# Altium PCB PCB1 (1).PcbDoc
Units mm, origin at the board's own origin, x right, y up, seen from the top; angles counter-clockwise.
Board outline 62 x 75 mm, 2 copper layers (Top Layer, Bottom Layer); 48 components, 34 nets, 138 pads, 29 vias.
Unrouted connection lines stored in the file: 19.
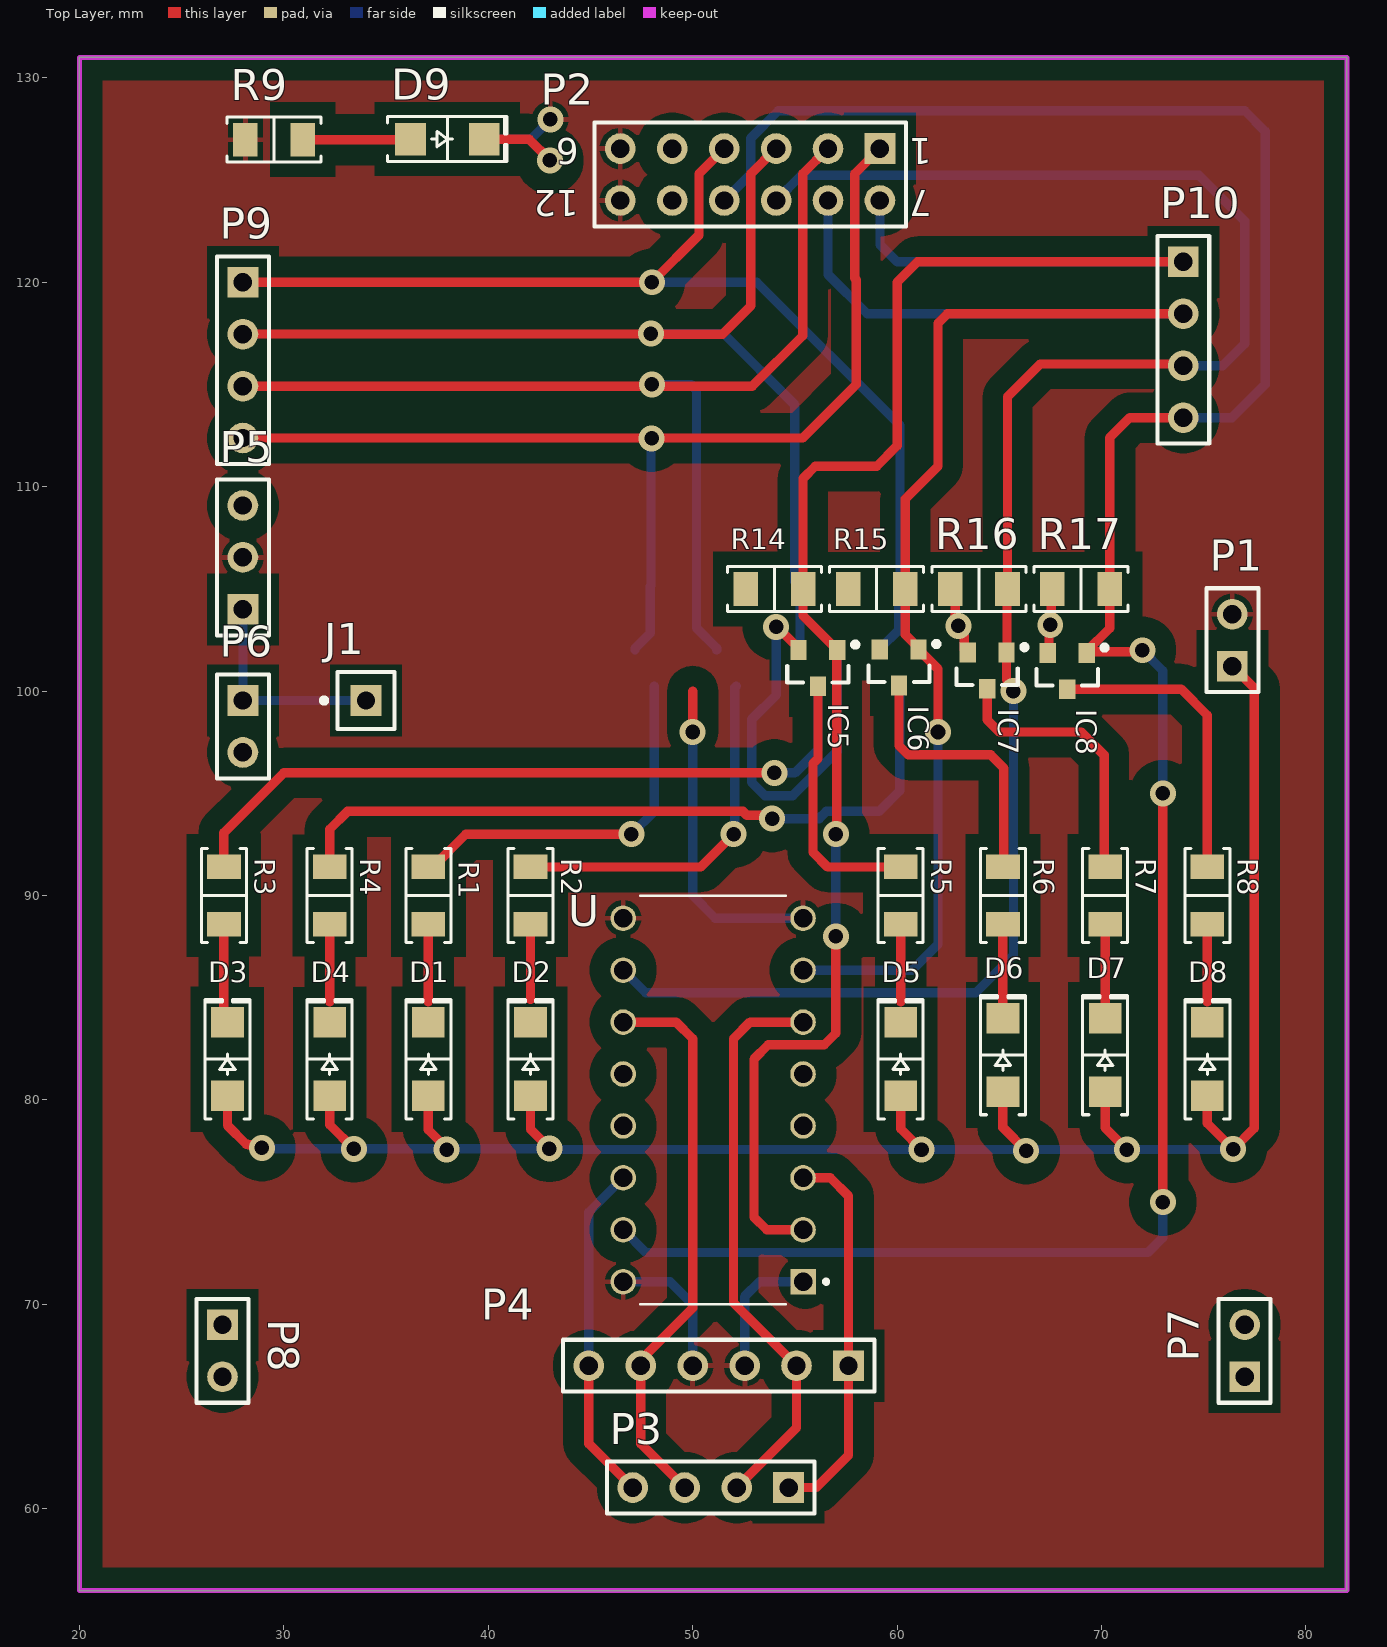
[diagram p0: Top Layer view]
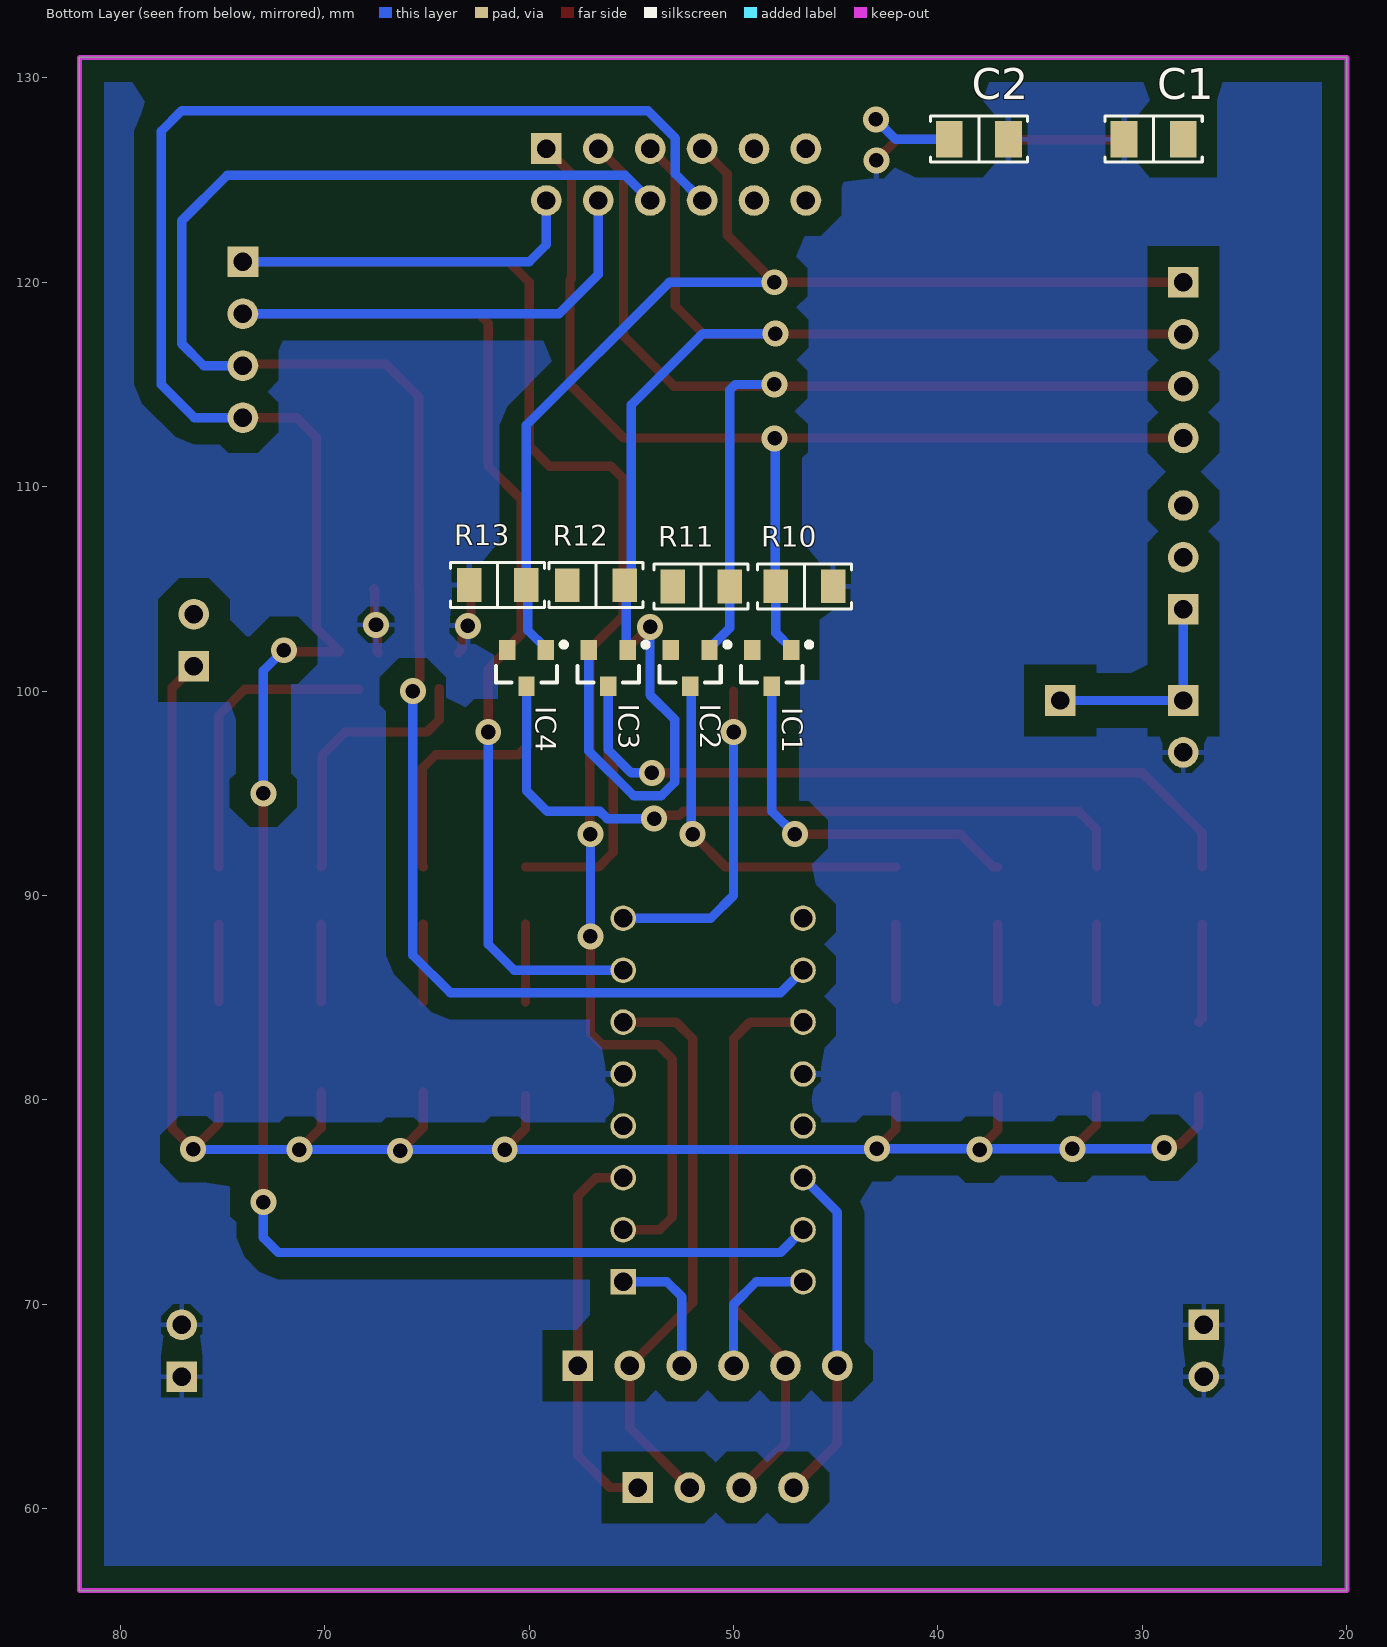
[diagram p1: Bottom Layer view, seen from below]
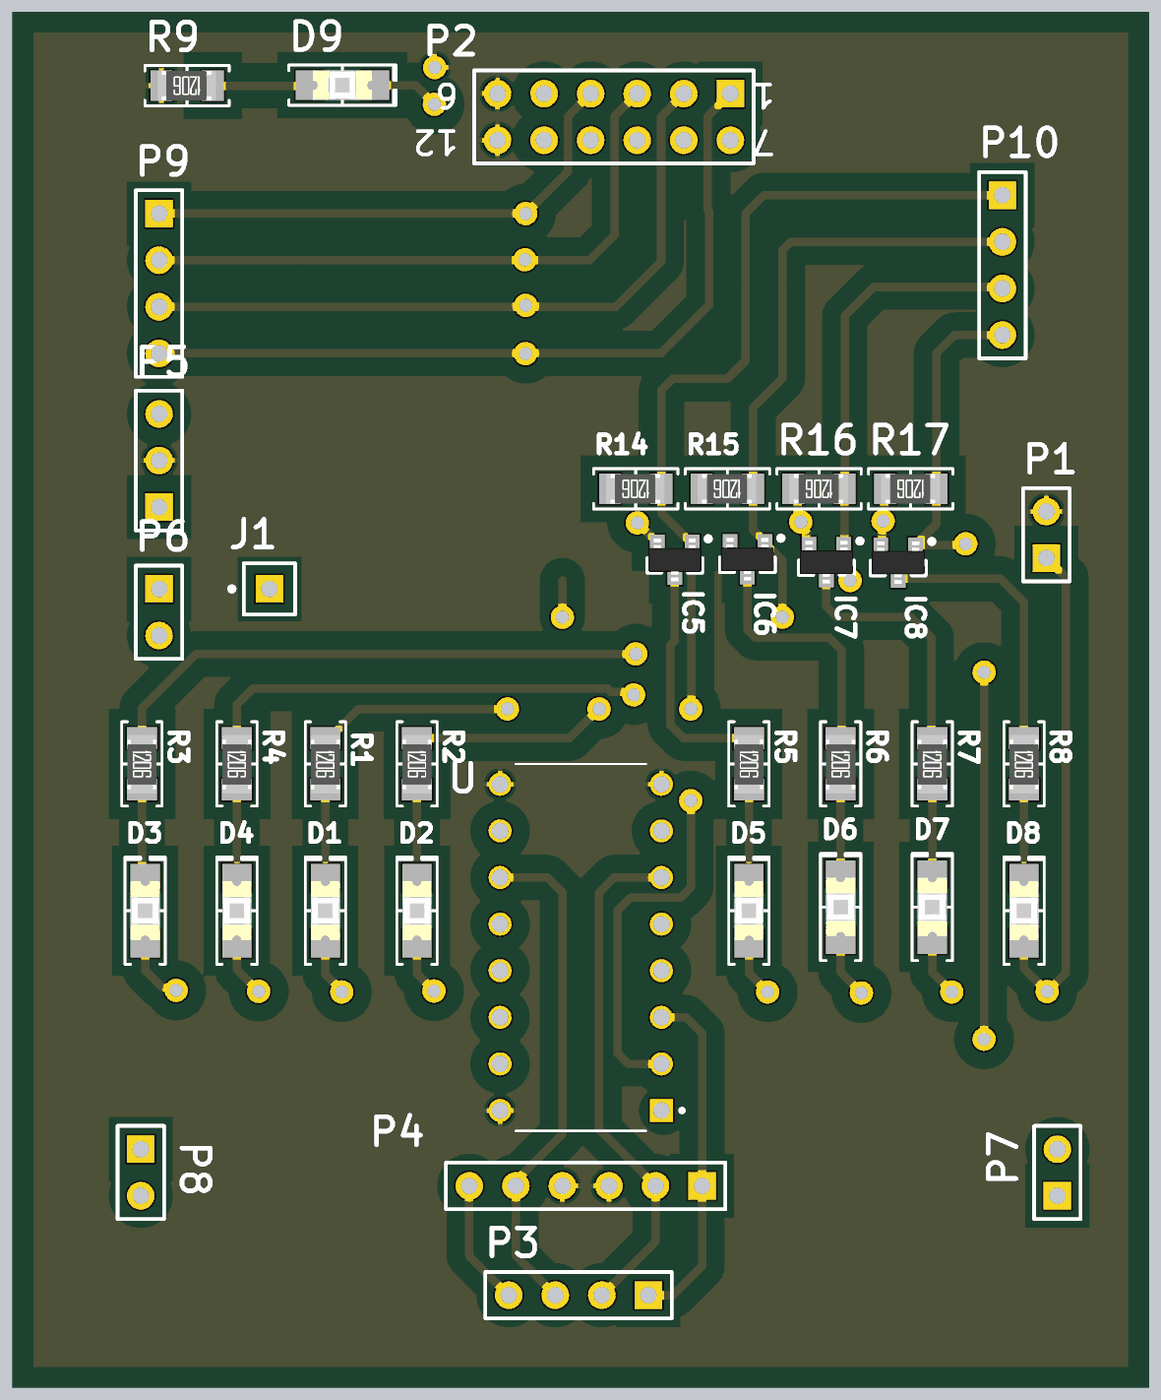
[diagram p2: 3D render of the assembled board from above, using the file's embedded part models]
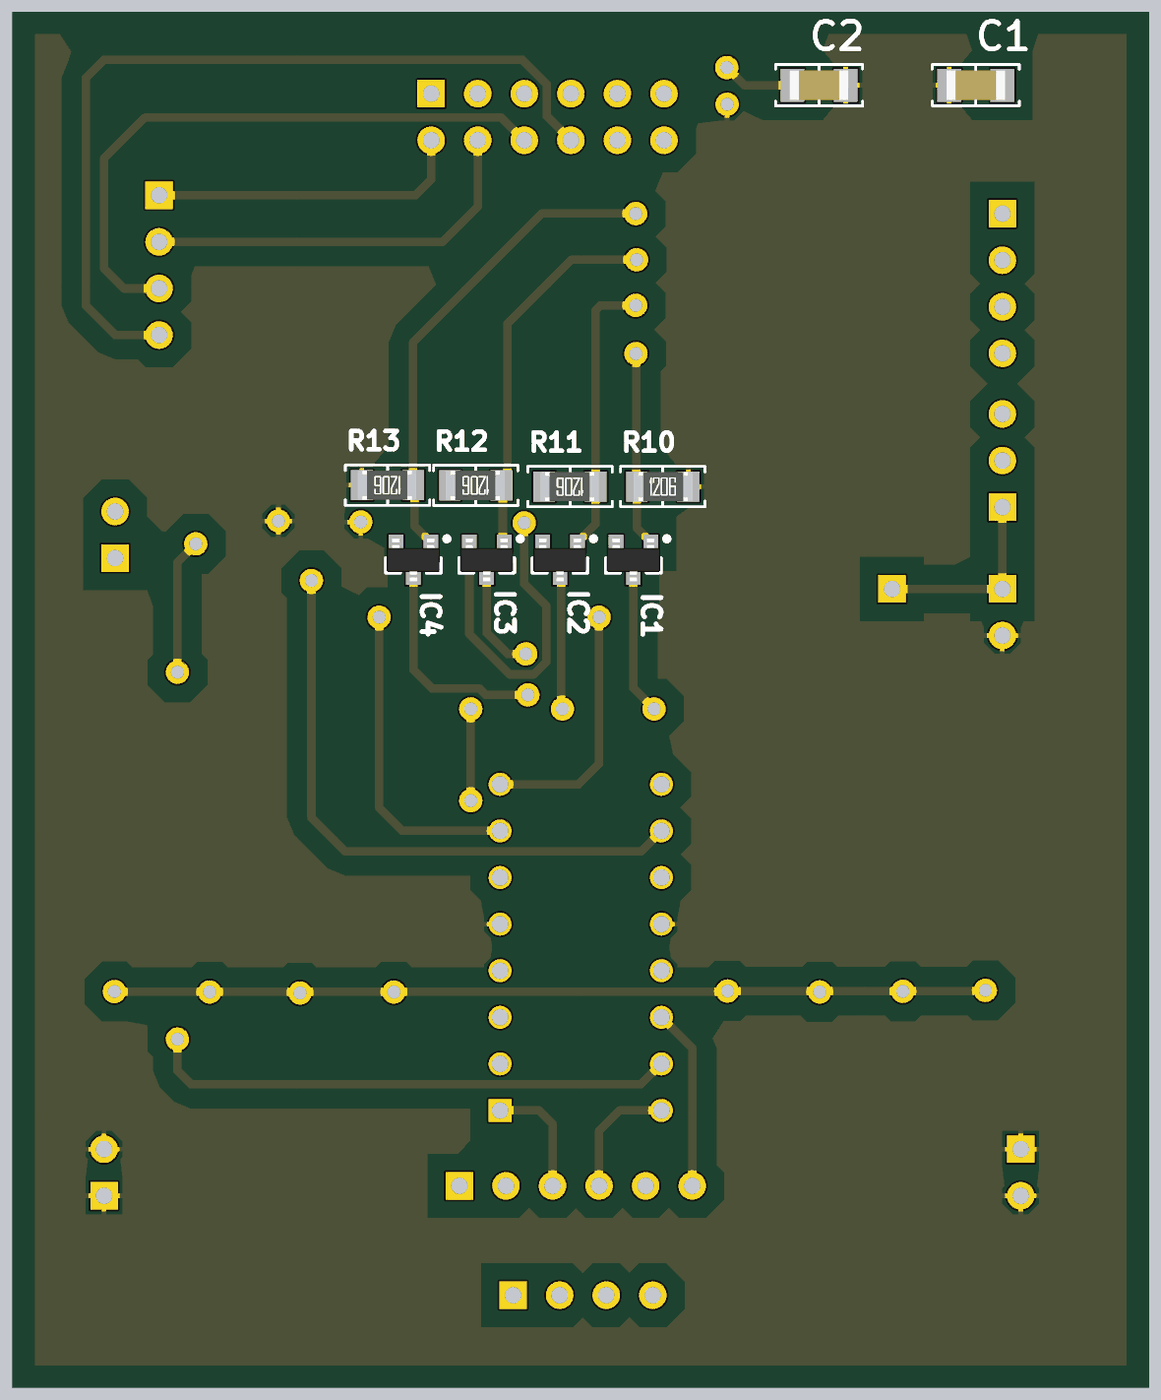
[diagram p3: 3D render of the assembled board from below, using the file's embedded part models]

## Layer stack, top to bottom
Top Solder: solder mask 0.0102, Solder Resist, Dk 3.5
Top Layer: signal copper 0.0356
Dielectric 1: dielectric 0.32, FR-4, Dk 4.8
Bottom Layer: signal copper 0.0356
Bottom Solder: solder mask 0.0102, Solder Resist, Dk 3.5

## Board outline
20,56 20,131 82,131 82,56

## Design rules (kind name [scope] priority, off if disabled: settings)
Clearance ates [All] p1: gap=0.254 ignorepadtopadclearanceinfootprint=TRUE except(0: Arc-Hole Track-Hole SMDPad-Hole THPad-Hole Via-Hole Fill-Hole Poly-Hole Region-Hole Text-Hole; 1: Arc-Poly Track-Poly SMDPad-Poly THPad-Poly Via-Poly Fill-Poly Poly-Poly)
PolygonConnect [All] p1: connectstyle=Relief reliefconductorwidth=0.254 reliefentries=4 polygonreliefangle="90 Angle" airgapwidth=0.254
RoutingVias [All] p1: holewidth=0.711 width=1.27 viastyle="Through Hole" minholewidth=0.711 minwidth=1.27 maxholewidth=0.711 maxwidth=1.27
SolderMaskExpansion [All] p1: expansion=0.102 istentingtop=FALSE
Width [All] p1: maxlimit=1.016 minlimit=0.254 preferedwidth=0.457 minimp=50.000000 maximp=50.000000 favimp=50.000000
30 further rules are at their usual default settings.

## Components (designator, comment, footprint, x,y, rotation, side; value= is the part's Value field where it differs from the comment)
C1 "10uF" "CAP 1206/3216" 29.45,127 r180 bottom
C2 "100uF" "CAP 1206/3216" 38,127 r0 bottom
D1 "Red" "LED 1206/3216 RED" 37.069,82 r90 top value=Green
D2 "Red" "LED 1206/3216 RED" 42.069,82 r90 top value=Green
D3 "Red" "LED 1206/3216 RED" 27.244,82 r90 top value=Green
D4 "Red" "LED 1206/3216 RED" 32.244,82 r90 top value=Green
D5 "Red" "LED 1206/3216 RED" 60.175,82 r90 top value=Green
D6 "Red" "LED 1206/3216 RED" 65.175,82.2 r90 top value=Green
D7 "Red" "LED 1206/3216 RED" 70.175,82.2 r90 top value=Green
D8 "Red" "LED 1206/3216 RED" 75.175,82 r90 top value=Green
D9 "Red" "LED 1206/3216 RED" 38,127 r0 top value=Green
IC1 "IRLML2502GTRPBF" "INFINEON SOT-23-3" 48.128,101.124 r270 bottom
IC2 "IRLML2502GTRPBF" "INFINEON SOT-23-3" 52.128,101.124 r270 bottom
IC3 "IRLML2502GTRPBF" "INFINEON SOT-23-3" 56.128,101.124 r270 bottom
IC4 "IRLML2502GTRPBF" "INFINEON SOT-23-3" 60.128,101.124 r270 bottom
IC5 "IRLML2502GTRPBF" "INFINEON SOT-23-3" 56.128,101.124 r270 top
IC6 "IRLML2502GTRPBF" "INFINEON SOT-23-3" 60.094,101.155 r270 top
IC7 "IRLML2502GTRPBF" "INFINEON SOT-23-3" 64.402,101 r270 top
IC8 "IRLML2502GTRPBF" "INFINEON SOT-23-3" 68.32,100.98 r270 top
J1 "Socket" PIN1 34.021,99.54 r90 top
P1 "Header 2" HDR1X2 76.399,101.223 r90 top
P2 "Header 6X2A" HDR2X6_CEN 59.16,126.54 r180 top
P3 "Header 4" HDR1X4 54.69,61.041 r180 top
P4 "Header 6" HDR1X6 57.62,67 r180 top
P5 "Header 3" HDR1X3 28,104 r90 top
P6 "Header 2" HDR1X2 28,99.54 r270 top
P7 "Header 2" HDR1X2 77,66.46 r90 top
P8 "Header 2" HDR1X2 27,69 r270 top
P9 "Header 4" HDR1X4 28,120 r270 top
P10 "Header 4" HDR1X4 74,121 r270 top
R1 "1.5k" "RES 1206/3216" 37.069,90 r270 top
R2 "1.5k" "RES 1206/3216" 42.069,90 r270 top
R3 "1.5k" "RES 1206/3216" 27.069,90 r270 top
R4 "1.5k" "RES 1206/3216" 32.244,90 r270 top
R5 "1.5k" "RES 1206/3216" 60.175,90 r270 top
R6 "1.5k" "RES 1206/3216" 65.175,90 r270 top
R7 "1.5k" "RES 1206/3216" 70.175,90 r270 top
R8 "1.5k" "RES 1206/3216" 75.175,90 r270 top
R9 "1.5k" "RES 1206/3216" 29.525,126.975 r180 top
R10 "10k" "RES 1206/3216" 46.528,105.124 r180 bottom
R11 "10k" "RES 1206/3216" 51.584,105.117 r0 bottom
R12 "10k" "RES 1206/3216" 56.728,105.184 r0 bottom
R13 "10k" "RES 1206/3216" 61.538,105.196 r0 bottom
R14 "10k" "RES 1206/3216" 54,105 r180 top
R15 "10k" "RES 1206/3216" 59,105 r180 top
R16 "10k" "RES 1206/3216" 64,105 r180 top
R17 "10k" "RES 1206/3216" 69,105 r180 top
U "L293D" DIP880W50P254L2000H510Q16 51,80 r180 top

## Footprints (in the part's own frame and the unit in brackets; to place one, negate y for a bottom-side part, rotate by r counter-clockwise, add the part's x,y. Pads: shape width x height; smd on the part's side, far side on the other; paste and mask are expansions set on the pad)
"CAP 1206/3216" [mm] "Chip Capacitor, 2-Leads, Body 3.25x1.60mm, IPC Medium Density"
  rect 1.3x1.8 smd: 1(-1.45,0) 2(1.45,0)
  silkscreen extent -2.37,-1.12 2.37,1.12, body extent -1.6,-0.81 1.6,0.81, height 1.62
DIP880W50P254L2000H510Q16 [mm]
  rect 1.25x1.25 hole 0.9: 1(-4.4,8.89)
  round 1.25 hole 0.9: 2(-4.4,6.35) 3(-4.4,3.81) 4(-4.4,1.27) 5(-4.4,-1.27) 6(-4.4,-3.81) 7(-4.4,-6.35) 8(-4.4,-8.89) 9(4.4,-8.89) 10(4.4,-6.35) 11(4.4,-3.81) 12(4.4,-1.27) 13(4.4,1.27) 14(4.4,3.81) 15(4.4,6.35) 16(4.4,8.89)
  silkscreen extent -5.63,-10 3.55,10
HDR1X2 [mm] "Connector; Header; 2 Position"
  rect 1.5x1.5 hole 0.9: 1(0,0)
  round 1.5 hole 0.9: 2(2.54,0)
  silkscreen extent -1.27,-1.27 3.81,1.27
HDR1X3 [mm] "Connector; Header; 3 Position"
  rect 1.5x1.5 hole 0.9: 1(0,0)
  round 1.5 hole 0.9: 2(2.54,0) 3(5.08,0)
  silkscreen extent -1.27,-1.27 6.35,1.27
HDR1X4 [mm] "Connector; Header; 4 Position"
  rect 1.5x1.5 hole 0.9: 1(0,0)
  round 1.5 hole 0.9: 2(2.54,0) 3(5.08,0) 4(7.62,0)
  silkscreen extent -1.27,-1.27 8.89,1.27
HDR1X6 [mm] "Connector; Header; 6 Position"
  rect 1.5x1.5 hole 0.9: 1(0,0)
  round 1.5 hole 0.9: 2(2.54,0) 3(5.08,0) 4(7.62,0) 5(10.16,0) 6(12.7,0)
  silkscreen extent -1.27,-1.27 13.97,1.27
HDR2X6_CEN [mm] "Connector; Header; 6x2 Position"
  rect 1.5x1.5 hole 0.9: 1(0,0)
  round 1.5 hole 0.9: 2(2.54,0) 3(5.08,0) 4(7.62,0) 5(10.16,0) 6(12.7,0) 7(0,2.54) 8(2.54,2.54) 9(5.08,2.54) 10(7.62,2.54) 11(10.16,2.54) 12(12.7,2.54)
  silkscreen extent -1.27,-1.27 13.97,3.81
"INFINEON SOT-23-3" [mm] "SOT23, 3-Leads, Body 2.90x2.40mm, Pitch 0.95mm, IPC Medium Density"
  rect 0.972x0.802 smd: 1(-0.885,0.95) 2(0.885,0) 3(-0.885,-0.95)
  silkscreen extent -1.27,-1.5 0.7,1.95, body extent -1.16,-1.45 1.16,1.45, height 1
"LED 1206/3216 RED" [mm] "Chip Diode, 2-Leads, Body 3.13x1.55mm, IPC Medium Density"
  rect 1.5x1.6 smd: 1(-1.8,0) 2(1.8,0)
  silkscreen extent -2.92,-1.1 2.92,1.1, body extent -1.6,-0.8 1.6,0.8, height 0.9
PIN1 [mm] "Connector; Plug"
  rect 1.5x1.5 hole 0.9: 1(0,0)
  silkscreen extent -1.4,-1.4 1.4,2.17
"RES 1206/3216" [mm] "Chip Resistor, 2-Leads, Body 3.13x1.55mm, IPC Medium Density"
  rect 1.2x1.65 smd: 1(-1.4,0) 2(1.4,0)
  silkscreen extent -2.3,-1.1 2.3,1.1, body extent -1.58,-0.8 1.62,0.8, height 0.6

## Part data
C1: library part CL31A106KOCLNNC, "CAP CER 10UF 16V X5R 1206", Device Package="1206 (3216 Metric)", Manufacturer="Samsung Electro-Mechanics America, Inc.", Supplier Part Number 1=1276-2721-2-ND, TemperatureCoefficient=X5R, TemperatureRange="-55C ~ 85C", Tolerance=10%, Voltage=16V, ComponentLink1Description=Datasheet, ComponentLink1URL=//media.digikey.com/pdf/Data%20Sheets/Samsung%20PDFs/CL31A106KOCLNNC_Spec.pdf, ComponentLink2Description="Digi-Key Listing", ComponentLink2URL=https://www.digikey.com/product-detail/en/samsung-electro-mechanics-america-inc/CL31A106KOCLNNC/1276-2721-2-ND/3888379, Part Number=CL31A106KOCLNNC, PartId=15855, Price=0.0558, Supplier 1=Digi-Key
C2: library part CL31A107MQHNNNE, "CAP CER 100UF 6.3V X5R 1206", Device Package="1206 (3216 Metric)", Manufacturer="Samsung Electro-Mechanics America, Inc.", Supplier Part Number 1=1276-1782-2-ND, TemperatureCoefficient=X5R, TemperatureRange="-55C ~ 85C", Tolerance=20%, Voltage=6.3V, ComponentLink1Description=Datasheet, ComponentLink1URL=http://www.samsungsem.com/kr/support/product-search/mlcc/CL31A107MQHNNNE.jsp, ComponentLink2Description="Digi-Key Listing", ComponentLink2URL=https://www.digikey.com/product-detail/en/samsung-electro-mechanics-america-inc/CL31A107MQHNNNE/1276-1782-2-ND/3887440, Part Number=CL31A107MQHNNNE, PartId=15816, Price=0.272, Supplier 1=Digi-Key
D1 D2 D3 D4 D5 D6 D7 D8 D9: library part SM1206NHC-IL, "LED RED CLEAR 1206 SMD", Current (Test)=20mA, Device Package="1206 (3216 Metric)", Manufacturer="Bivar Inc.", Supplier Part Number 1=492-1944-2-ND, Voltage Forward=2.1V, Colour=Red, ComponentLink1Description=Datasheet, ComponentLink1URL=http://www.bivar.com/Portals/0/Products/SM1206NHC-IL.pdf, ComponentLink2Description="Digi-Key Listing", ComponentLink2URL=http://www.digikey.ca/product-detail/en/SM1206NHC-IL/492-1944-2-ND/5030132, Lens Transparency=Clear, Millicandela=1250mcd, Part Number=SM1206NHC-IL, PartId=7105, Price=0.1915, Supplier 1=Digi-Key, Type="Surface Mount", Viewing Angle=30
IC1 IC2 IC3 IC4 IC5 IC6 IC7 IC8: "MOSFET N-CH 20V 4.2A SOT-23-3", Current Continuous Drain="4.2A (Ta)", Device Package="TO-236-3, SC-59, SOT-23-3", Drain to Source Voltage (Vdss)=20V, Manufacturer="Infineon Technologies", Supplier Part Number 1=IRLML2502GTRPBFCT-ND, Input Capacitance (Ciss) at Vds="740pF @ 15V", ComponentLink1Description=Datasheet, ComponentLink1URL=http://www.irf.com/product-info/datasheets/data/irlml2502gpbf.pdf, ComponentLink2Description="Digi-Key Listing", ComponentLink2URL=https://www.digikey.com/product-detail/en/infineon-technologies/IRLML2502GTRPBF/IRLML2502GTRPBFCT-ND/2354246, Gate Charge (Qg)="12nC @ 5V", Part Number=IRLML2502GTRPBF, PartId=29488, Price=0.6, Rds On (Max) at Id, Vgs="45 mOhm @ 4.2A, 4.5V", Supplier 1=Digi-Key, Type=N-Channel, Vgs(th) (Max) at Id=12V
P1 P6 P7 P8: "Header, 2-Pin", LatestRevisionDate=17-Jul-2002, LatestRevisionNote="Re-released for DXP Platform.", Publisher="Altium Limited"
P2: "Header, 6-Pin, Dual row", LatestRevisionDate=17-Jul-2002, LatestRevisionNote="Re-released for DXP Platform.", Publisher="Altium Limited"
P3 P9 P10: "Header, 4-Pin", LatestRevisionDate=17-Jul-2002, LatestRevisionNote="Re-released for DXP Platform.", Publisher="Altium Limited"
P4: "Header, 6-Pin", LatestRevisionDate=17-Jul-2002, LatestRevisionNote="Re-released for DXP Platform.", Publisher="Altium Limited"
P5: "Header, 3-Pin", LatestRevisionDate=17-Jul-2002, LatestRevisionNote="Re-released for DXP Platform.", Publisher="Altium Limited"
R1 R2 R3 R4 R5 R6 R7 R8 R9: library part ERJ-8ENF1501V, "RES SMD 1.5K OHM 1% 1/4W 1206", Device Package="1206 (3216 Metric)", Manufacturer="Panasonic Electronic Components", PowerRating="0.25W, 1/4W", Supplier Part Number 1=P1.50KFTR-ND, TemperatureCoefficient=100ppm/C, TemperatureRange="-55C ~ 155C", Tolerance=1%, ComponentLink1Description=Datasheet, ComponentLink1URL=http://industrial.panasonic.com/www-cgi/jvcr13pz.cgi?E+PZ+3+AOA0002+ERJ8ENF1501V+7+WW, ComponentLink2Description="Digi-Key listing", ComponentLink2URL=http://digikey.com/product-detail/en/ERJ-8ENF1501V/P1.50KFTR-ND/88895, Part Number=ERJ-8ENF1501V, PartId=2988, Price=0.0093, Supplier 1=Digi-Key, Type="Thick Film"
R10 R11 R12 R13 R14 R15 R16 R17: library part ERJ-8ENF1002V, "RES SMD 10K OHM 1% 1/4W 1206", Device Package="1206 (3216 Metric)", Manufacturer="Panasonic Electronic Components", PowerRating="0.25W, 1/4W", Supplier Part Number 1=P10.0KFTR-ND, TemperatureCoefficient=100ppm/C, TemperatureRange="-55C ~ 155C", Tolerance=1%, ComponentLink1Description=Datasheet, ComponentLink1URL=http://industrial.panasonic.com/www-cgi/jvcr13pz.cgi?E+PZ+3+AOA0002+ERJ8ENF1002V+7+WW, ComponentLink2Description="Digi-Key listing", ComponentLink2URL=http://digikey.com/product-detail/en/ERJ-8ENF1002V/P10.0KFTR-ND/89059, Part Number=ERJ-8ENF1002V, PartId=2956, Price=0.0093, Supplier 1=Digi-Key, Type="Thick Film"
U: "Bipolar Motor Driver Parallel 16-PowerDIP", Package="SOIC-20 STMicroelectronics", Availability=Unavailable, MF=STMicroelectronics, MP=L293D, Price=None, SnapEDA_Link=https://www.snapeda.com/parts/L293D/STMicroelectronics/view-part/83726/?ref=snap
J1: LatestRevisionDate=17-Jul-2002, LatestRevisionNote="Re-released for DXP Platform.", Publisher="Altium Limited"

## Via types
v1: diameter 1.27, hole 0.711, Top Layer to Bottom Layer, 29 vias

## Nets (pads, with @x,y where several pads share a name; then routed paths per layer and width w, separated by ;. In a path a pad name is that pad's centre, name@x,y a point inside that pad or via, vN(x,y) a via of type N, cw(c..) or ccw(c..) an arc to the next point about the centre after c; other vN are vias at no path point)
GND: C1.1 C2.1 D9.2 IC1.3 IC2.3 IC3.3 IC4.3 IC5.3 IC6.3 IC7.3 IC8.3 P2.5 P2.11 P6.2 P7.1 P7.2 P8.1 P8.2 R10.2 R11.2 R12.2 R13.2 R14.2 R15.2 R16.2 R17.2 U.4 U.5 U.12 U.13 | length 30.4
  Top Layer w0.457: D9.2 41.998,127 43.016,125.982 v1(43.016,125.961) ; v1(54.084,103.143) 54.129,103.143 55.178,102.094 IC5.3 ; R16.2 62.846,104.754 62.846,103.346 v1(63.002,103.191) 63.002,102.971 63.279,102.693 63.279,102.057 IC7.3 ; IC8.3 67.43,101.925 67.43,103.184 v1(67.491,103.244) 67.546,103.299 67.546,104.946 R17.2
  Bottom Layer w0.457: v1(54.084,103.143) 54.084,99.814 52.882,98.613 52.882,95.537 53.537,94.882 54.888,94.882 57.078,97.072 IC3.3
NetD1_1: D1.1 D2.1 D3.1 D4.1 D5.1 D6.1 D7.1 D8.1 P1.1 | length 96.7
  Top Layer w0.457: D3.1 27.244,78.756 28.159,77.841 28.244,77.841 28.27,77.815 28.776,77.815 v1(28.932,77.659) ; D4.1 32.244,78.793 v1(33.431,77.606) ; D1.1 37.069,78.542 37.966,77.645 v1(37.966,77.571) ; D2.1 42.069,78.566 42.995,77.64 v1(42.995,77.624) ; D5.1 60.175,78.587 v1(61.193,77.569) ; D6.1 65.175,78.651 v1(66.31,77.516) ; D7.1 70.175,78.636 v1(71.242,77.569) ; D8.1 75.175,78.859 v1(76.439,77.596) 77.466,78.623 77.466,100.156 P1.1
  Bottom Layer w0.457: 29.598,77.622 42.995,77.622 43.042,77.575 v1@76.355,77.575
NetD1_2: D1.2 R1.2 | length 3.8
  Top Layer w0.457: 37.069,84.8 R1.2
NetD2_2: D2.2 R2.2 | length 3.7
  Top Layer w0.457: 42.063,84.919 42.069,84.925 R2.2
NetD3_2: D3.2 R3.2 | length 4.9
  Top Layer w0.457: R3.2 27.069,83.975 D3.2
NetD4_2: D4.2 R4.2 | length 3.8
  Top Layer w0.457: 32.244,84.8 R4.2
NetD5_2: D5.2 R5.2 | length 3.8
  Top Layer w0.457: 60.175,84.8 R5.2
NetD6_2: D6.2 R6.2 | length 3.8
  Top Layer w0.457: 65.175,84.8 R6.2
NetD7_2: D7.2 R7.2 | length 3.8
  Top Layer w0.457: 70.175,84.8 R7.2
NetD8_2: D8.2 R8.2 | length 3.8
  Top Layer w0.457: 75.175,84.8 R8.2
NetD9_1: D9.1 R9.1 | length 5.3
  Top Layer w0.457: R9.1 36.175,126.975 D9.1
NetP2_1: IC1.1 P2.1 P9.4 R10.1 | length 53.9
  Top Layer w0.457: P9.4 55.38,112.38 58,115 58,120.117 57.927,120.19 57.927,125.307 P2.1
  Bottom Layer w0.457: IC1.1 47.178,102.094 47.928,102.844 R10.1 47.959,105.154 47.959,112.336 v1(47.99,112.366)
NetP2_2: IC2.1 P2.2 P9.3 R11.1 | length 53.5
  Top Layer w0.457: P9.3 52.92,114.92 55.387,117.387 55.387,125.307 P2.2
  Bottom Layer w0.457: v1(48,115) 49.916,115 50.184,114.732 R11.1 50.184,103.088 51.178,102.094 IC2.1
NetP2_3: IC3.1 P2.3 P9.2 R12.1 | length 54.3
  Top Layer w0.457: P9.2 28.013,117.473 47.941,117.473 v1(47.954,117.485) 47.979,117.46 51.46,117.46 52.847,118.847 52.847,125.307 P2.3
  Bottom Layer w0.457: v1(47.954,117.485) 51.515,117.485 55,114 55,105.362 55.253,105.109 55.253,102.084 IC3.1
NetP2_4: IC4.1 P2.4 P9.1 R13.1 | length 54.4
  Top Layer w0.457: P9.1 v1(48,120) 50.307,122.307 50.307,125.307 P2.4
  Bottom Layer w0.457: v1(48,120) 53.138,120 60.138,113 R13.1 60.067,105.125 60.067,102.982 59.178,102.094 IC4.1
NetP2_7: IC5.1 P2.7 P10.1 R14.1 U.2 | length 87.5
  Top Layer w0.457: U.2 53.618,73.65 53,74.268 53,82 53.702,82.702 54.941,82.702 56.435,82.702 57,83.268 v1(57,88) ; IC5.1@56.906,102.266 56.821,102.266 55.4,103.687 R14.1 55.4,110.4 56,111 59,111 60,112 60,120 61,121 P10.1 ; v1(57,93) 57.039,93.039 57.039,101.97 IC5.1
  Bottom Layer w0.457: v1(57,88) v1(57,93) ; P2.7 59.16,121.84 60,121 P10.1
NetP2_8: IC6.1 P2.8 P10.2 R15.1 U.7 | length 72.8
  Top Layer w0.457: v1(62,98) 62,101.084 IC6.1 61.044,102.125 60.4,102.769 R15.1 60.4,109.4 62,111 62,118 62.46,118.46 P10.2
  Bottom Layer w0.457: U.7 60.732,86.35 62,87.618 v1(62,98) ; P2.8 56.62,120.38 58.54,118.46 P10.2
NetP2_9: IC7.1 P2.9 P10.3 R16.1 U.10 | length 90.9
  Top Layer w0.457: v1(65.692,100) 65.692,100.22 65.352,100.56 IC7.1 65.376,101.909 65.376,104.976 R16.1 65.4,114.4 67,116 73.92,116 P10.3
  Bottom Layer w0.457: U.10 47.708,85.242 63.85,85.242 65.692,87.084 v1(65.692,100) ; P2.9 55.313,125.233 74.767,125.233 77,123 77,117 75.92,115.92 P10.3
NetP2_10: IC8.1 P2.10 P10.4 R17.1 U.15 | length 120.8
  Top Layer w0.457: v1(72,102) 71.932,101.932 69.287,101.932 69.27,101.95 70.4,103.08 R17.1 70.4,112.4 71.38,113.38 P10.4 P10.4@73.975,113.355 ; v1(73,75) v1(73,95)
  Bottom Layer w0.457: U.15 47.708,72.542 72.275,72.542 73,73.268 v1(73,75) ; P2.10 52.847,125.307 52.847,127.051 54.187,128.39 77,128.39 78,127.39 78,115 76.38,113.38 P10.4 ; v1(72,102) 73,101 v1(73,95)
NetP3_1: P3.1 P4.1 U.3 | length 19
  Top Layer w0.457: P3.1 56.041,61.041 57.62,62.62 P4.1 57.62,75.302 56.732,76.19 U.3 U.3@55.299,76.089
NetP3_2: P3.2 P4.2 U.6 | length 28.2
  Top Layer w0.457: P3.2 55.08,63.971 P4.2 52,70.08 52,83 52.81,83.81 U.6
NetP3_3: P3.3 P4.5 U.11 | length 27.6
  Top Layer w0.457: U.11 49.19,83.81 50,83 50,69.822 47.46,67.282 P4.5 47.46,63.191 P3.3
NetP3_4: P3.4 P4.6 U.14 | length 16.7
  Top Layer w0.457: P4.6 44.92,63.191 P3.4
  Bottom Layer w0.457: P4.6 44.92,74.51 U.14
NetR1_1: IC1.2 R1.1 | length 18.3
  Top Layer w0.457: R1.1 37.294,91.4 38.894,93 v1(47,93)
  Bottom Layer w0.457: v1(47,93) 48.128,94.128 IC1.2
NetR2_1: IC2.2 R2.1 | length 17.9
  Top Layer w0.457: R2.1 50.4,91.4 v1(52,93)
  Bottom Layer w0.457: v1(52,93) 52.064,93.064 52.064,100.175 IC2.2
NetR3_1: IC3.2 R3.1 | length 35.5
  Top Layer w0.457: R3.1 27.069,93.069 30,96 v1(54,96)
  Bottom Layer w0.457: v1(54,96) 55,96 56.128,97.128 IC3.2
NetR4_1: IC4.2 R4.1 | length 35.9
  Top Layer w0.457: R4.1 32.244,93.244 33.118,94.118 52.463,94.118 52.66,93.92 53.727,93.92 v1(53.882,93.765)
  Bottom Layer w0.457: v1(53.882,93.765) 56.184,93.765 56.537,94.118 59.118,94.118 60.128,95.128 IC4.2
NetR5_1: IC5.2 R5.1 | length 12.8
  Top Layer w0.457: IC5.2 56.128,96.709 55.882,96.463 55.882,92.118 56.6,91.4 R5.1
NetR6_1: IC6.2 R6.1 | length 13.4
  Top Layer w0.457: IC6.2 60.094,97.325 60.537,96.882 64.573,96.882 65.225,96.23 65.225,91.45 R6.1
NetR7_1: IC7.2 R7.1 | length 13.4
  Top Layer w0.457: IC7.2 64.402,98.598 65,98 69,98 70.125,96.875 70.125,91.45 R7.1
NetR8_1: IC8.2 R8.1 | length 14.8
  Top Layer w0.457: IC8.2 73.905,100.095 75.175,98.825 R8.1
V_EXT: J1.1 P5.1 P6.1 | length 10.5
  Bottom Layer w0.457: P5.1 P6.1 J1.1
VCC: P5.3
VDD: C1.2 C2.2 P1.2 P2.6 P2.12 P4.3 P4.4 P5.2 R9.2 U.1 U.8 U.9 U.16 | length 33.4
  Top Layer w0.457: v1(50,98) 50,100 ; U.1 U.1@55.51,71
  Bottom Layer w0.457: C2.2 42.074,127 v1(43.036,127.963) ; U.16 48.89,71.11 50,70 P4.4 ; v1(50,98) 50,90 51.11,88.89 U.8 ; P4.3 52.54,70.382 53.268,71.11 U.1

## Polygon pours and split planes (outlines as drawn)
GND on Bottom Layer "GND_L02_P000" (solid, remove dead copper, pour order 0): 20,131 20,56 82,56 82,131
VDD on Top Layer "VDD_L01_P001" (solid, pour order 1): 20,131 20,56 82,56 82,131

## Keep-outs
Keep-Out Layer:
  lines w0.254: 20,56 22,56 82,56 82,131 20,131 20,56

## Text inside footprints (layer, text, board x,y; h text height)
P2: Top Overlay "12" at 44.428,124.508 h1.27 r180; Top Overlay "6" at 44.428,127.048 h1.27 r180; Top Overlay "1" at 61.7,127.048 h1.27 r180; Top Overlay "7" at 61.7,124.508 h1.27 r180